# Altium PCB PCB1.PcbDoc (part 2 of 2)
Units mm, origin at the board's own origin, x right, y up, seen from the top; angles counter-clockwise.
Board outline 73.56 x 14.27 mm, 2 copper layers (Top Layer, Bottom Layer); 32 components, 52 nets, 198 pads, 60 vias.
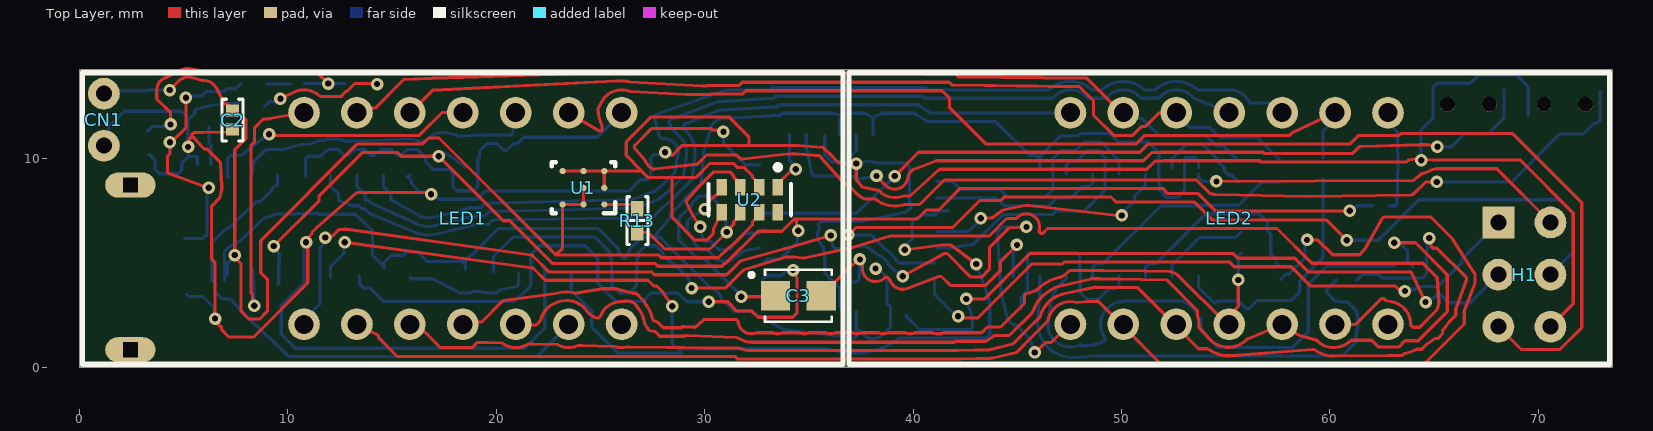
[diagram p0: Top Layer view]

## Via types
v1: diameter 0.6, hole 0.3, Top Layer to Bottom Layer, 60 vias

## Nets (pads, with @x,y where several pads share a name; then routed paths per layer and width w, separated by ;. In a path a pad name is that pad's centre, name@x,y a point inside that pad or via, vN(x,y) a via of type N, cw(c..) or ccw(c..) an arc to the next point about the centre after c; other vN are vias at no path point) (continued)
NetU4_12: (continued)
  Bottom Layer w0.152: U4.12@12.04,4.318 12.04,4.818 12.687,5.466 12.687,5.956 v1(12.725,5.994) ; U5.12@23.597,4.496 23.597,3.683 24.577,2.703 24.577,1.92 25.82,0.677 28.904,0.677 28.692,0.889 ; v1(28.443,2.93) 28.444,2.929 28.444,1.137 28.692,0.889 ; v1(39.602,5.633) 39.602,5.754 39.743,5.895 39.743,5.935 39.959,6.152 39.959,6.994 40.153,7.187 40.276,7.187 40.315,7.187 40.445,7.317 U.12@41.125,7.317 ; U.12@40.928,7.512 U.12@41.694,7.512 ; v1(43.028,4.953) 43.516,3.639 cw(c42.545,3.277) 43.532,3.592 ; 43.533,3.591 43.678,3.141 43.678,1.493 43.589,1.404 39.404,1.404 ccw(c39.404,1.251) 39.401,1.404 39.351,1.403 39.326,1.383 cw(c37.247,4.088) 37.247,0.677 cw(c37.247,5.252) 35.869,0.889 29.108,0.889 28.692,0.889
VCC: C2.2 CN1.2 H1.2 IC1.3 U1.A2 U1.A3 U1.B2 U2.7 U3.10 U3.16 U4.10 U4.16 U5.10 U5.16 U.4 U.6 U.18 U.20 | length 158.6
  Top Layer w0.152: v1(4.332,13.301) 4.772,13.741 cw(c5.218,13.296) 5.379,13.905 5.818,13.789 5.918,13.75 cw(c5.983,13.123) 6.47,13.523 6.542,13.435 6.91,12.727 6.924,12.702 6.988,12.638 7.106,12.638 7.147,12.596 7.195,12.548 7.195,12.467 7.584,12.078 7.771,12.078 7.991,11.859 7.991,10.985 7.442,10.436 v1(7.442,5.385) 7.442,5.264 7.752,4.954 7.752,2.685 8.121,2.316 8.643,2.316 9.012,2.685 9.012,4.221 8.692,4.542 8.692,6.078 13.333,10.719 16.47,10.719 16.75,10.998 17.247,10.998 22.855,5.39 ; U1.B2 U1.A2 U1.A3 23.181,5.716 22.855,5.39 ; U2.7 32.61,7.292 32.29,6.972 32.29,6.831 31.386,5.927 31.38,5.921 30.789,5.393 30.783,5.387 30.649,5.253 27.919,5.253 27.782,5.39 22.855,5.39 ; v1(54.557,8.915) 63.988,8.957 64.424,9.296 64.509,9.313 ccw(c64.389,9.931) 64.668,9.367 64.845,9.454 cw(c65.126,8.89) 65.126,9.52 68.011,9.52 H1.2
  Bottom Layer w0.152: 1.956,13.27 3.267,13.27 3.299,13.301 v1(4.332,13.301) ; U4.16@6.96,4.118 6.96,5.561 7.137,5.738 7.684,6.052 8.823,7.137 9.407,7.341 11.32,7.391 11.446,7.391 11.497,7.341 13.22,7.341 13.362,7.199 13.4,7.199 14.061,6.537 14.061,5.374 U4.10@14.62,4.815 ; U4.16 7.087,4.987 7.442,5.343 v1(7.442,5.385) ; U4.10@14.62,4.773 U4.10@14.62,4.815 ; U5.16 U5.16@18.517,4.907 ; U.4@36.475,11.167 36.475,11.87 36.542,12.001 36.632,12.09 ; U.20@37.275,2.667 37.275,1.992 37.275,1.901 ; U.6@38.075,11.167 38.075,11.933 ; v1(38.197,4.737) 38.318,4.737 38.602,4.452 38.632,4.452 38.74,4.345 38.74,3.072 U.18 38.918,1.944 38.785,1.811 38.661,1.689 38.556,1.583 ; 38.555,1.583 38.547,1.575 cw(c38.075,1.992) 37.552,1.639 37.423,1.769 37.364,1.811 37.275,1.901 ; U3.10@46.076,9.563 U3.10@46.076,9.991 ; U3.16 53.696,9.089 53.869,8.915 v1(54.557,8.915) ; U3.16@53.696,9.563 53.696,9.881 53.522,10.054 53.109,10.054 53.02,9.965 53.02,8.468 52.69,8.139 52.179,8.139 51.831,8.487 51.831,8.779 51.791,8.819 51.791,10.306 51.287,10.81 49.85,10.81 49.444,11.216 48.033,11.216 47.916,11.1 47.074,11.1 46.076,10.101 U3.10@46.076,9.991 ; U4.10@14.62,4.815 14.62,5.027 14.968,5.375 15.528,5.375 15.603,5.45 15.641,5.45 15.73,5.54 16.223,5.54 16.571,5.191 16.571,5.169 16.66,5.08 18.343,5.08 U5.16@18.517,4.907 ; U5.16@18.517,4.907 18.517,5.136 18.736,5.355 18.791,5.355 20.091,6.655 24.883,6.655 25.867,5.67 25.867,5.481 26.137,5.212 26.137,5.237 26.276,5.377 26.406,5.652 26.992,6.238 27.526,6.238 ; 27.526,6.238 27.849,6.238 30.303,3.784 30.332,3.754 cw(c30.198,3.139) 30.814,3.273 30.843,3.244 31.405,2.682 32.315,2.682 32.36,2.637 32.449,2.548 33.726,1.828 37.059,1.397 37.185,1.397 37.275,1.486 37.275,1.901 ; 27.526,6.238 27.615,6.327 28.312,7.162 28.348,7.205 28.348,7.328 28.981,7.961 28.981,8.031 29.607,8.657 29.634,8.657 29.696,8.657 29.752,8.713 29.825,8.802 29.937,10.158 ccw(c28.094,10.31) 29.94,10.203 ccw(c28.094,10.31) 29.943,10.344 30.294,11.489 cw(c30.897,11.303) 30.861,11.933 33.626,12.09 33.726,12.191 36.108,12.191 36.506,12.09 36.632,12.09 ; 36.632,12.09 36.758,12.09 36.927,12.191 37.708,12.191 37.985,12.023 38.075,11.933 ; 38.075,11.933 38.164,12.023 38.527,12.191 40.096,12.191 40.197,12.09 40.685,11.786 43.961,11.786 45.583,10.164 45.902,10.164 U3.10@46.076,9.991
Vin: C1.2 D1.1 IC1.4 J.1 | length 13.1
  Top Layer w0.152: v1(4.334,10.799) 4.334,10.233 4.216,10.116 4.216,9.372 4.285,9.304 v1(6.198,8.611) ; v1@4.335,10.871 4.479,10.871 5.105,11.497 v1(5.105,12.929)
  Bottom Layer w0.152: C1.2@4.225,10.135 4.334,10.244 v1(4.334,10.799) ; J.1@5.048,6.174 5.056,6.183 5.925,6.183 6.119,6.376 6.119,8.532 v1(6.198,8.611) ; v1(5.105,12.929) 5.185,13.008 5.843,13.008 IC1.4 6.92,13.232 7.053,13.365 7.507,13.365 D1.1
pads on no net: J.2 J.3 J.4 J.SH1 J.SH2 J.SH3 J.SH4 J.SH5 J.SH6 LED1.7 LED2.7 SW3.6 SW3.7 SW4.6 SW4.7 U2.8 U3.9 U5.2 U5.3 U5.4 U5.5 U5.6 U5.7 U5.9 U.7 U.8 U.9 U.19 U.22 U.23 U.24 U.30 U.31

## Silkscreen, mask and mechanical layers (free items; w line width, h text height)
Board:
  the board outline again, w0.127